# Altium PCB t6.3.PcbDoc
Units mm, origin at the board's own origin, x right, y up, seen from the top; angles counter-clockwise.
Board outline 52.36 x 71.37 mm, 2 copper layers (Top Layer, Bottom Layer), stack 0.818 mm thick; 27 components, 68 nets, 257 pads, 68 vias.
Unrouted connection lines stored in the file: 4.
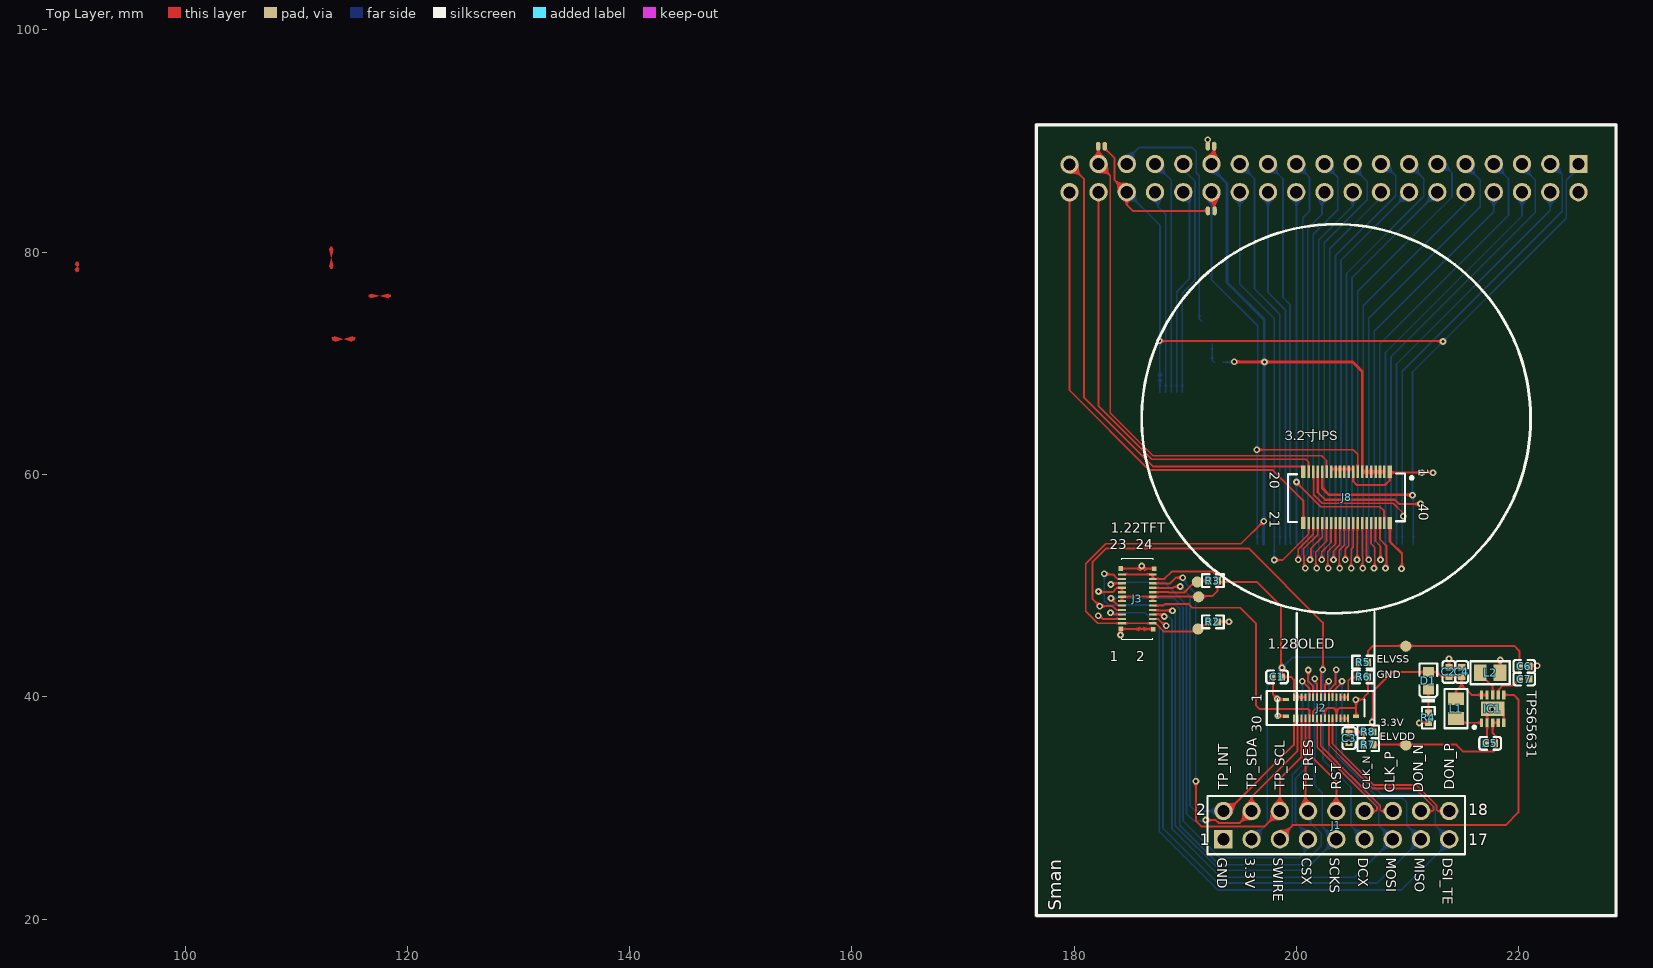
[diagram p0: Top Layer view]
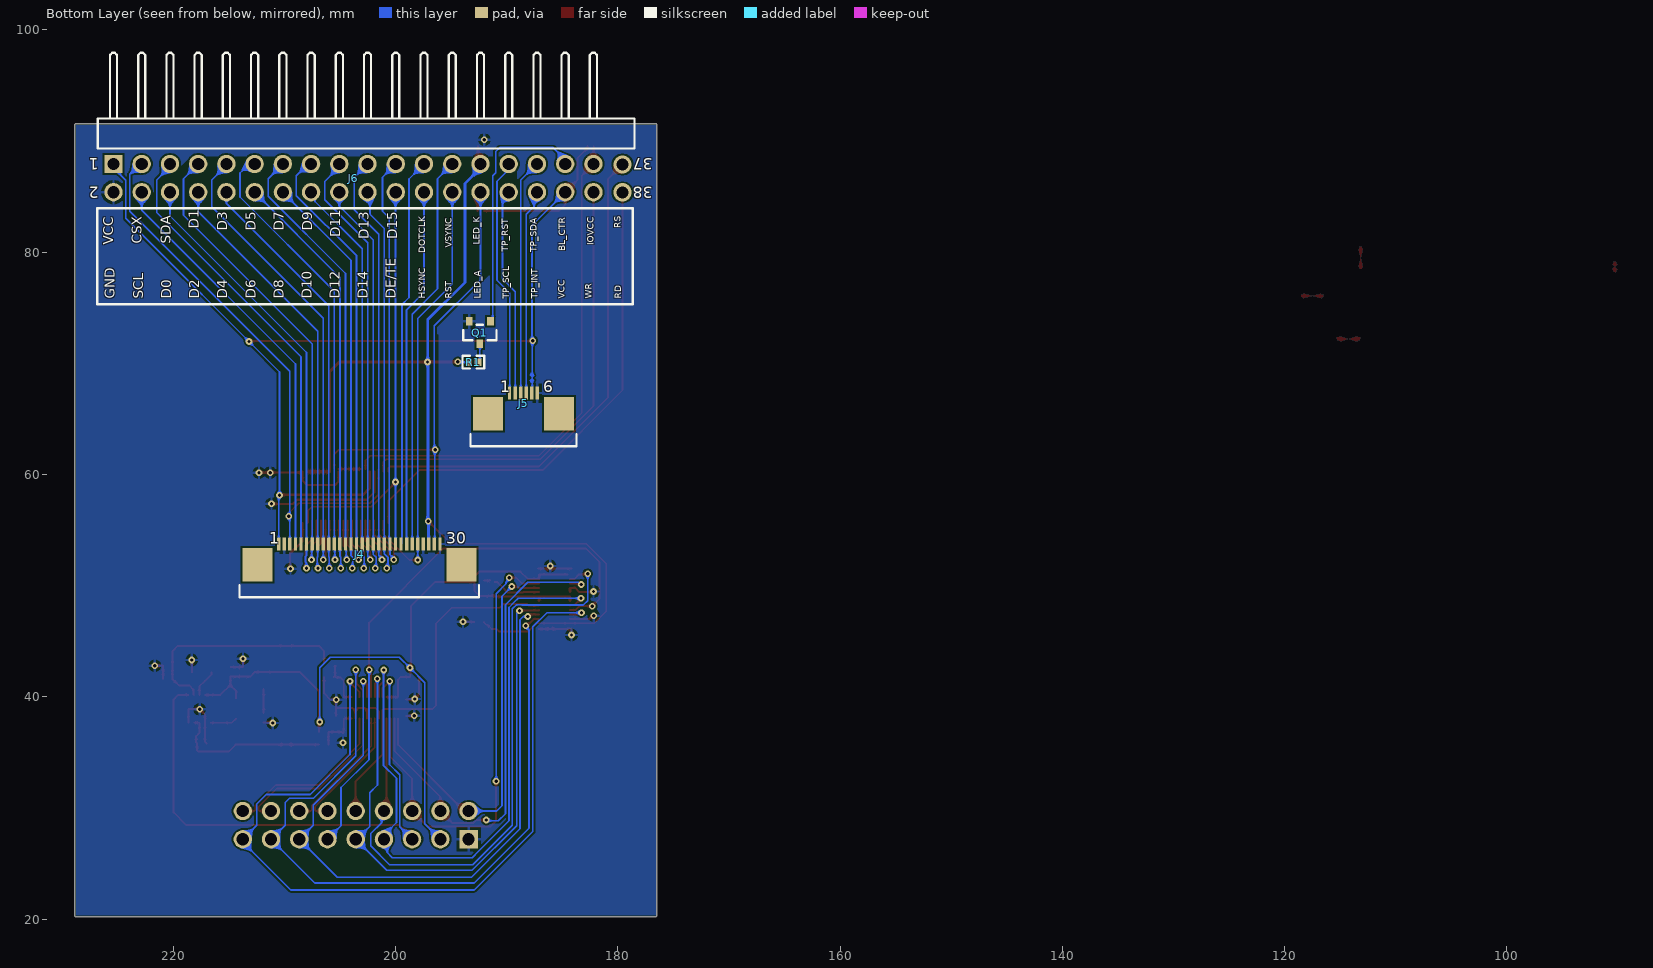
[diagram p1: Bottom Layer view, seen from below]
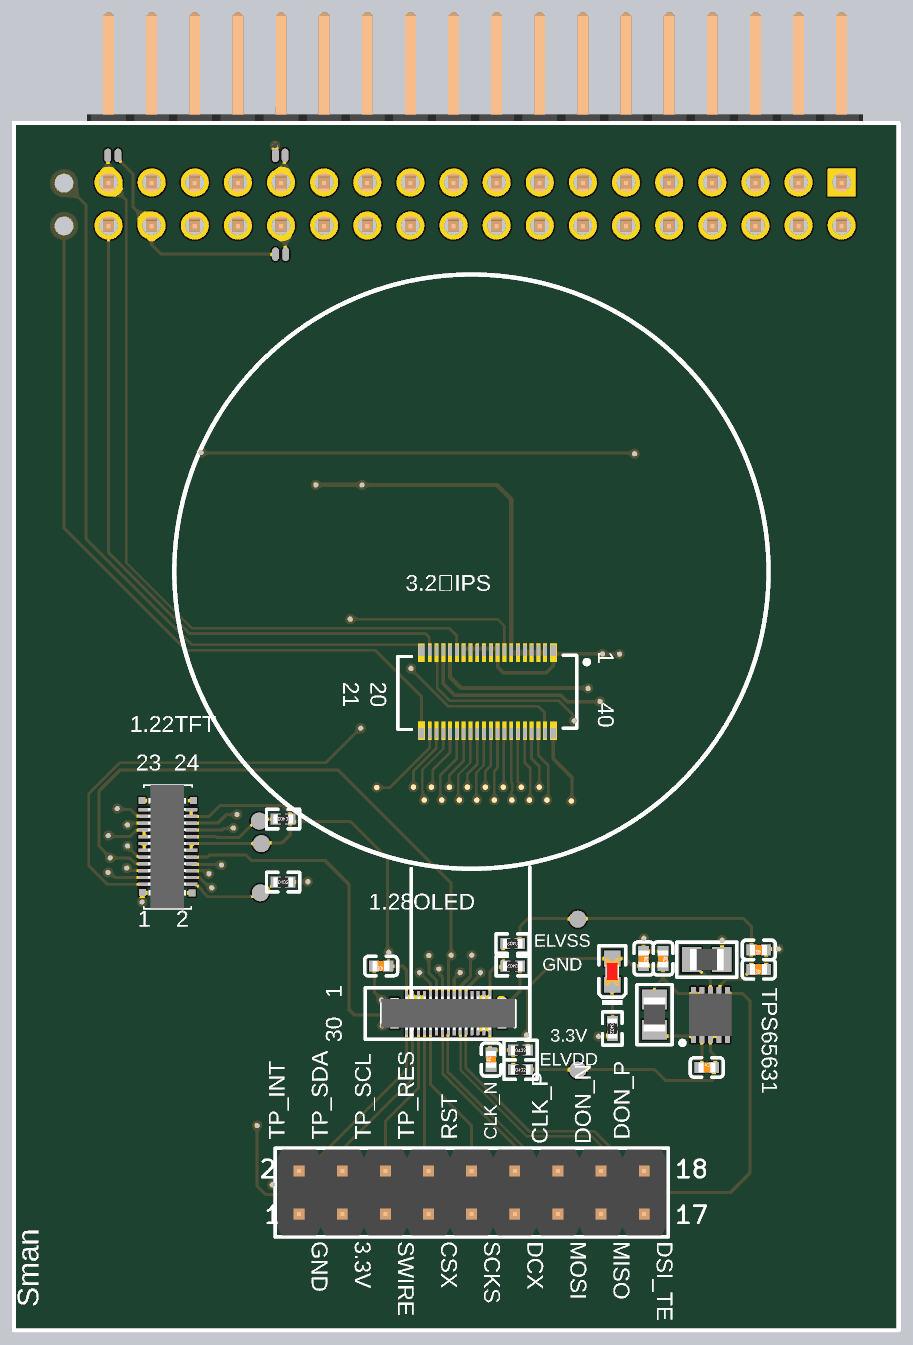
[diagram p2: 3D render of the assembled board from above, using the file's embedded part models]
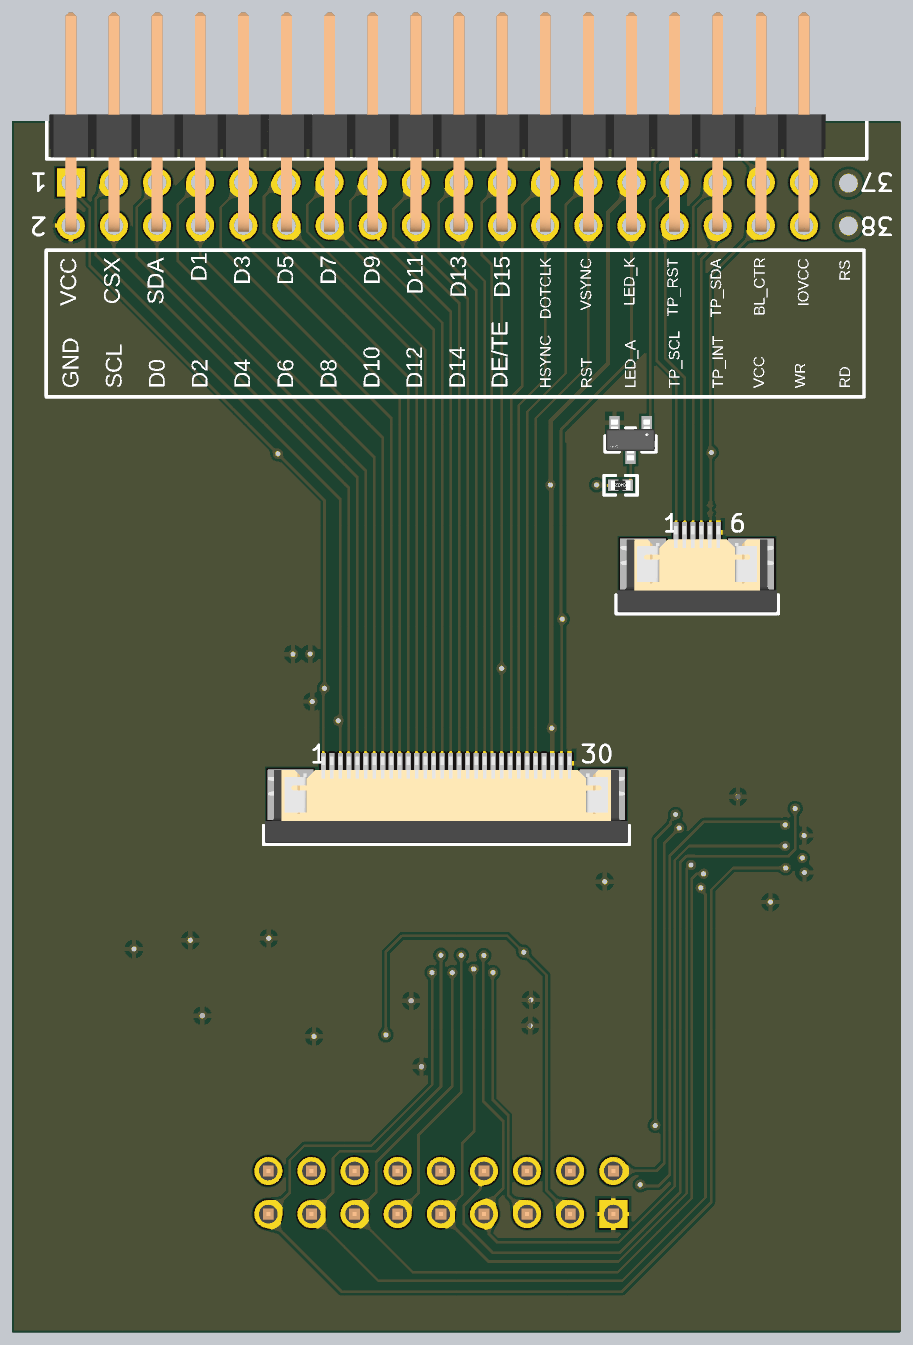
[diagram p3: 3D render of the assembled board from below, using the file's embedded part models]

## Layer stack, top to bottom
Top Solder: solder mask 0.0102, Solder Resist, Dk 3.5
Top Layer: signal copper 0.0356
Dielectric 6: prepreg 0.0711, PP-006, Dk 4.1
Dielectric 4: prepreg 0.0711, PP-006, Dk 4.1
Dielectric 2: prepreg 0.0711, PP-006, Dk 4.1
Dielectric 1: dielectric 0.32, FR-4, Dk 4.8
Dielectric 3: prepreg 0.0711, PP-006, Dk 4.1
Dielectric 5: prepreg 0.0711, PP-006, Dk 4.1
Dielectric 7: prepreg 0.0711, PP-006, Dk 4.1
Bottom Layer: signal copper 0.0356
Bottom Solder: solder mask 0.0102, Solder Resist, Dk 3.5

## Board outline
176.49,20.32 176.49,91.44 cw(c176.617,91.44) 176.617,91.567 228.727,91.567 cw(c228.727,91.44) 228.854,91.44 228.854,20.32 cw(c228.727,20.32) 228.727,20.193 176.617,20.193 cw(c176.617,20.32)

## Design rules (kind name [scope] priority, off if disabled: settings)
Clearance [All] p1: gap=0.152 ignorepadtopadclearanceinfootprint=FALSE
DiffPairsRouting DiffPairsRouting_1 [All] p1: maxlimit=0.254 minlimit=0.152 mostfreqgap=0.152 toplayer_minwidth=0.152 toplayer_maxwidth=0.152 toplayer_prefwidth=0.152 bottomlayer_minwidth=0.152 bottomlayer_maxwidth=0.152 bottomlayer_prefwidth=0.152 maxuncoupledlength=12.7
MatchedLengths [InDifferentialPair ('DON')] p1: tolerance=25.4 checknetsindiffpair=FALSE checkdiffpairvsdiffpair=TRUE checkxsignals=TRUE checkothers=TRUE
MatchedLengths DiffPair_MatchedLengths [InDifferentialPairClass('New Class')] p2: tolerance=25.4 checknetsindiffpair=FALSE checkdiffpairvsdiffpair=TRUE checkxsignals=TRUE checkothers=TRUE
MatchedLengths DiffPair_MatchedLengths_1 [InDifferentialPairClass('New Class')] p3: tolerance=25.4 checknetsindiffpair=FALSE checkdiffpairvsdiffpair=TRUE checkxsignals=TRUE checkothers=TRUE
MatchedLengths DiffPair_MatchedLengths_2 [InDifferentialPairClass('New Class')] p4: tolerance=25.4 checknetsindiffpair=FALSE checkdiffpairvsdiffpair=TRUE checkxsignals=TRUE checkothers=TRUE
MatchedLengths DiffPair_MatchedLengths_3 [InDifferentialPairClass('New Class')] p5: tolerance=25.4 checknetsindiffpair=FALSE checkdiffpairvsdiffpair=TRUE checkxsignals=TRUE checkothers=TRUE
MatchedLengths DiffPair_MatchedLengths_4 [InDifferentialPairClass('New Class')] p6: tolerance=25.4 checknetsindiffpair=FALSE checkdiffpairvsdiffpair=TRUE checkxsignals=TRUE checkothers=TRUE
PolygonConnect [All] p1: connectstyle=Relief reliefconductorwidth=0.254 reliefentries=4 polygonreliefangle="90 Angle" airgapwidth=0.254
RoutingVias [All] p1: holewidth=0.711 width=1.27 viastyle="Through Hole" minholewidth=0.711 minwidth=1.27 maxholewidth=0.711 maxwidth=1.27
SolderMaskExpansion [All] p1: expansion=0.102 istentingtop=FALSE
Width [All] p1: maxlimit=0.254 minlimit=0.1 preferedwidth=0.254
29 further rules are at their usual default settings.

## Classes and differential pairs
component class MIAN: C1 C2 C3 C4 C5 C6 C7 D1 IC1 J1 J2 J3 J4 J5 L1 L2 Q1 R1 R3 R4 R5 R6 R7 R8
differential pair DON: +DON_P -DON_N
differential pair CLK: +CLK_P -CLK_N

## Components (designator, comment, footprint, x,y, rotation, side; value= is the part's Value field where it differs from the comment)
C1 "100nF" 0402_C 198.247,41.783 r180 top value=100pF
C2 "10uF" 0402_C 213.714,42.231 r270 top
C3 "100nF" 0402_C 204.724,36.278 r90 top value=100pF
C4 "10uF" 0402_C 214.857,42.231 r270 top
C5 "10uF" 0402_C 217.424,35.814 r0 top
C6 "10uF" 0402_C 220.489,42.739 r180 top
C7 "10uF" 0402_C 220.489,41.596 r180 top
D1 "红灯 0603" 0603_LED_S1 211.863,41.454 r90 top
IC1 "TPS65631" SON50P250X250X80-11N-D 217.643,38.909 r90 top
J1 "61301821121" 61301821121 203.581,28.448 r0 top locked
J2 "BM28B0.6-30DS_2-0.35V_53_" BM28B0630DS2035V53 202.331,39.006 r0 top
J3 "BM14B_0.8_-24DS-0.4V_53_" BM14B0824DS04V53 186.131,48.803 r90 top
J4 "68713014522" 68713014522 203.251,51.177 r180 bottom locked
J5 "68710614522" 68710614522 188.485,64.767 r180 bottom
J6 "61303621021" 61303621021 203.782,90.668 r0 bottom
J8 "AXK770147G" FP-AXK770147G-MFG 201.511,57.937 r180 top (schematic designator J1)
L1 "10uH ±10%" 0805_L 214.349,38.929 r90 top
L2 "10uH ±10%" 0805_L 217.424,42.164 r0 top
Q1 "SS8050-G" FP-SS8050-G-MFG 192.405,72.771 r270 bottom
R1 "0Ω (0R0) ±1%" 0402_R 192.996,70.104 r0 bottom
R2 "0Ω (0R0) ±1%" 0402_R 192.471,46.73 r0 top
R3 "0Ω (0R0) ±1%" 0402_R 192.471,50.444 r180 top
R4 "0Ω (0R0) ±1%" 0402_R 211.863,38.108 r270 top
R5 "0Ω (0R0) ±1%" 0402_R 205.99,43.104 r180 top
R6 "0Ω (0R0) ±1%" 0402_R 205.994,41.783 r180 top
R7 "0Ω (0R0) ±1%" 0402_R 206.458,35.687 r0 top
R8 "0Ω (0R0) ±1%" 0402_R 206.458,36.83 r0 top

## Footprints (in the part's own frame and the unit in brackets; to place one, negate y for a bottom-side part, rotate by r counter-clockwise, add the part's x,y. Pads: shape width x height; smd on the part's side, far side on the other; paste and mask are expansions set on the pad)
0402_C [mm]
  rect 0.6x0.65 smd mask+0.051: 1(-0.425,0) 2(0.425,0)
  silkscreen extent -0.97,-0.58 0.98,0.58, body extent -0.48,-0.3 0.52,0.3, height 0.2
0402_R [mm]
  rect 0.6x0.65 smd mask+0.051: 1(-0.425,0) 2(0.425,0)
  silkscreen extent -0.98,-0.58 0.98,0.57, body extent -0.58,-0.27 0.57,0.28, height 0.41
0603_LED_S1 [mm]
  rect 0.93x0.98 smd: A(0.77,0) K(-0.77,0)
  silkscreen extent -1.98,-0.79 1.54,0.79, body extent -0.8,-0.4 0.8,0.4, height 0.6
0805_L [mm]
  rect 1.16x1.47 smd: 1(-0.89,0) 2(0.89,0)
  silkscreen extent -1.77,-1.03 1.77,1.04, body extent -1.02,-0.64 1.03,0.64, height 0.6
61301821121 [mm] "Pin Header, pitch 2.54 mm, THT, Vertical, dual row, 18p"
  rect 1.65x1.65 hole 1.1: 1(-10.16,-1.27)
  round 1.65 hole 1.1: 2(-10.16,1.27) 3(-7.62,-1.27) 4(-7.62,1.27) 5(-5.08,-1.27) 6(-5.08,1.27) 7(-2.54,-1.27) 8(-2.54,1.27) 9(0,-1.27) 10(0,1.27) 11(2.54,-1.27) 12(2.54,1.27) 13(5.08,-1.27) 14(5.08,1.27) 15(7.62,-1.27) 16(7.62,1.27) 17(10.16,-1.27) 18(10.16,1.27)
  silkscreen extent -11.58,-2.62 11.58,2.62, body extent -11.43,-2.54 11.43,2.54, height 8.59
61303621021 [mm] "Pin Header, pitch 2.54 mm, THT, Angled, dual row, 36p"
  rect 1.65x1.65 hole 1.1: 1(21.59,2.73)
  round 1.65 hole 1.1: 2(21.59,5.27) 3(19.05,2.73) 4(19.05,5.27) 5(16.51,2.73) 6(16.51,5.27) 7(13.97,2.73) 8(13.97,5.27) 9(11.43,2.73) 10(11.43,5.27) 11(8.89,2.73) 12(8.89,5.27) 13(6.35,2.73) 14(6.35,5.27) 15(3.81,2.73) 16(3.81,5.27) 17(1.27,2.73) 18(1.27,5.27) 19(-1.27,2.73) 20(-1.27,5.27) 21(-3.81,2.73) 22(-3.81,5.27) 23(-6.35,2.73) 24(-6.35,5.27) 25(-8.89,2.73) 26(-8.89,5.27) 27(-11.43,2.73) 28(-11.43,5.27) 29(-13.97,2.73) 30(-13.97,5.27) 31(-16.51,2.73) 32(-16.51,5.27) 33(-19.05,2.73) 34(-19.05,5.27) 35(-21.59,2.73) 36(-21.59,5.27)
  silkscreen extent -25.28,-7.27 23.01,1.35, body extent -22.86,-7.27 22.86,5.63, height 5.12
68710614522 [mm] "ZIF Connectors, Horizontal, Bottom Contact, pitch 0.5mm, 6p"
  rect 0.3x1.2 smd: 1(-1.25,2.56) 2(-0.75,2.56) 3(-0.25,2.56) 4(0.25,2.56) 5(0.75,2.56) 6(1.25,2.56)
  rect 2.7x3 smd: MP1(-3.18,0.7) MP2(3.18,0.7)
  silkscreen extent -4.77,-2.22 4.77,-1.12, body extent -4.7,-2.15 4.7,2.95, height 2.1
68713014522 [mm] "ZIF Connectors, Horizontal, Bottom Contact, pitch 0.5mm, 30p"
  rect 0.3x1.2 smd: 1(-7.25,2.56) 2(-6.75,2.56) 3(-6.25,2.56) 4(-5.75,2.56) 5(-5.25,2.56) 6(-4.75,2.56) 7(-4.25,2.56) 8(-3.75,2.56) 9(-3.25,2.56) 10(-2.75,2.56) 11(-2.25,2.56) 12(-1.75,2.56) 13(-1.25,2.56) 14(-0.75,2.56) 15(-0.25,2.56) 16(0.25,2.56) 17(0.75,2.56) 18(1.25,2.56) 19(1.75,2.56) 20(2.25,2.56) 21(2.75,2.56) 22(3.25,2.56) 23(3.75,2.56) 24(4.25,2.56) 25(4.75,2.56) 26(5.25,2.56) 27(5.75,2.56) 28(6.25,2.56) 29(6.75,2.56) 30(7.25,2.56)
  rect 2.7x3 smd: MP1(-9.18,0.7) MP2(9.18,0.7)
  silkscreen extent -10.77,-2.22 10.78,-1.12, body extent -10.7,-2.15 10.7,2.95, height 2.1
BM14B0824DS04V53 [mm]
  rect 0.2x0.7 smd: 1(-2.2,1.831) 2(-2.2,-0.94) 3(-1.8,1.831) 4(-1.8,-0.94) 5(-1.4,1.831) 6(-1.4,-0.94) 7(-1,1.831) 8(-1,-0.94) 9(-0.6,1.831) 10(-0.6,-0.94) 11(-0.2,1.831) 12(-0.2,-0.94) 13(0.2,1.831) 14(0.2,-0.94) 15(0.6,1.831) 16(0.6,-0.94) 17(1,1.831) 18(1,-0.94) 19(1.4,1.831) 20(1.4,-0.94) 21(1.8,1.831) 22(1.8,-0.94) 23(2.2,1.831) 24(2.2,-0.94)
  rect 0.41x0.4 smd: MP1(-2.688,1.942) MP2(-2.713,-0.985) MP3(2.722,-1.058) MP4(2.734,1.961)
  silkscreen extent -3.64,-0.99 3.64,1.85, body extent -3.63,-0.64 3.65,1.6, height 0.9
BM28B0630DS2035V53 [mm]
  rect 0.18x0.7 smd: 1(-2.577,0.95) 2(-2.577,-0.95) 3(-2.227,0.95) 4(-2.227,-0.95) 5(-1.877,0.95) 6(-1.877,-0.95) 7(-1.527,0.95) 8(-1.527,-0.95) 9(-1.177,0.95) 10(-1.177,-0.95) 11(-0.827,0.95) 12(-0.827,-0.95) 13(-0.477,0.95) 14(-0.477,-0.95) 15(-0.127,0.95) 16(-0.127,-0.95) 17(0.223,0.95) 18(0.223,-0.95) 19(0.573,0.95) 20(0.573,-0.95) 21(0.923,0.95) 22(0.923,-0.95) 23(1.273,0.95) 24(1.273,-0.95) 25(1.623,0.95) 26(1.623,-0.95) 27(1.973,0.95) 28(1.973,-0.95) 29(2.323,0.95) 30(2.323,-0.95)
  rect 0.53x0.31 smd: MP1(-3.282,0.745) MP2(-3.282,-0.745) MP3(3.028,-0.745) MP4(3.028,0.745)
  silkscreen extent -4.05,-0.8 3.8,0.79, body extent -4.05,-0.98 3.8,0.98, height 0.7
FP-AXK770147G-MFG [mm]
  rect 0.4x1.1 smd paste-1000 mask+0: 1(-6.885,-2.3) 2(-6.885,2.3) 39(0.894,-2.296) 40(0.89,2.297)
  rect 0.23x1.1 smd paste-1000 mask+0: 3(-6.4,-2.3) 4(-6.4,2.3) 5(-6,-2.3) 6(-6,2.3) 7(-5.6,-2.3) 8(-5.6,2.3) 9(-5.2,-2.3) 10(-5.2,2.3) 11(-4.8,-2.3) 12(-4.8,2.3) 13(-4.4,-2.3) 14(-4.4,2.3) 15(-4,-2.3) 16(-4,2.3) 17(-3.6,-2.3) 18(-3.6,2.3) 19(-3.2,-2.3) 20(-3.2,2.3) 21(-2.8,-2.3) 22(-2.8,2.3) 23(-2.4,-2.3) 24(-2.4,2.3) 25(-2,-2.3) 26(-2,2.3) 27(-1.6,-2.3) 28(-1.6,2.3) 29(-1.2,-2.3) 30(-1.2,2.3) 31(-0.8,-2.3) 32(-0.8,2.3) 33(-0.4,-2.3) 34(-0.4,2.3) 35(0,-2.3) 36(0,2.3) 37(0.4,-2.3) 38(0.4,2.3)
  silkscreen extent -8.97,-2.15 -7.46,2.15
FP-SS8050-G-MFG [mm]
  rect 0.8x0.6 smd paste+0 mask+0: 1(-1.01,0.95) 2(-1.01,-0.95) 3(1.01,0)
  silkscreen extent -0.7,-1.5 0.7,1.5, body extent -1.21,-1.45 1.21,1.45, height 1.15
SON50P250X250X80-11N-D [mm]
  rect 0.8x0.3 smd: 1(-1.25,1) 2(-1.25,0.5) 3(-1.25,0) 4(-1.25,-0.5) 5(-1.25,-1) 6(1.25,-1) 7(1.25,-0.5) 8(1.25,0) 9(1.25,0.5) 10(1.25,1)
  rect 1.3x2.1 smd: 11(0,0)
  silkscreen extent -1.77,1.53 -1.53,1.77, body extent -1.25,-1.25 1.25,1.25, height 0.77

## Part data
C1 C3: library part CAP, "Capacitor", Published=8-Jun-2000, Publisher="Altium Limited", Revision="July-2002: Re-released for DXP Platform."
C2 C4 C5 C6 C7: library part "0402 10uF (106) 20% 6.3V", "贴片电容", Package=0402, SuppliersPartNumber=C15525, ComponentLink1Description=供应商链接, ComponentLink1URL=http://www.szlcsc.com/product/details_16204.html, Supplier=LC
D1: library part "0603 红灯", "发光二极管", Package=0603, SuppliersPartNumber=C2286, ComponentLink1Description=供应商链接, ComponentLink1URL=http://www.szlcsc.com/product/details_2659.html, Supplier=LC
IC1: library part TPS65631WDSKR, "Integrated Circuit", Manufacturer_Name="Texas Instruments", Mouser Part Number=595-TPS65631WDSKR, Arrow Part Number=TPS65631WDSKR, Arrow Price/Stock=https://www.arrow.com/en/products/tps65631wdskr/texas-instruments, Datasheet Link=http://www.ti.com/lit/gpn/tps65631w, Height=0.8mm, Manufacturer_Part_Number=TPS65631WDSKR, Mouser Price/Stock=https://www.mouser.co.uk/ProductDetail/Texas-Instruments/TPS65631WDSKR?qs=6E8igxPflKf9wUn%252Bq%252B8X1Q%3D%3D
J1: library part CMP-1502-01101-1, "THT Vertical Pin Header WR-PHD, Pitch 2.54 mm, Dual Row, 18 pins", Contact Resistance=20mOhm, Manufacturer="Wurth Elektronik", Operating Temperature=-40to105degC, Rated Current=3A, Withstanding Voltage=500VAC, Working Voltage=250VAC, Datasheet URL=https://katalog.we-online.de/em/datasheet/6130xx21121.pdf, Gender=Male, Manufacturer URL=http://www.we-online.de, Mounting Technology=THT, Orientation=Vertical, Package Reference=61301821121, Packaging=Bag, PART NUMBER=61301821121, Pin Number=18, Pitch=2.54mm, Publisher=WurthElektronik, Row Number=Dual
J2: "Connector", Manufacturer_Name=Hirose, Manufacturer_Part_Number=BM28B0.6-30DS/2-0.35V(53), Mouser Part Number=798-28B0630DS2035V53, Datasheet Link=https://datasheet.datasheetarchive.com/originals/distributors/DKDS-30/589689.pdf, Height=0.6mm, Mouser Price/Stock=https://www.mouser.co.uk/ProductDetail/Hirose-Connector/BM28B06-30DS-2-035V53?qs=1mbolxNpo8dyGYNDVauvGQ%3D%3D
J3: "Connector", Arrow Part Number=BM14B(0.8)-24DS-0.4V(53), Manufacturer_Name=Hirose, Mouser Part Number=798-BM14B0824DS04V53, Arrow Price/Stock=https://www.arrow.com/en/products/bm14b-0.8-24ds-0.4v-53/hirose-electric, Datasheet Link=https://www.arrow.com/en/products/bm14b-0.8-24ds-0.4v-53/hirose-electric, Height=0.8mm, Manufacturer_Part_Number=BM14B(0.8)-24DS-0.4V(53), Mouser Price/Stock=https://www.mouser.co.uk/ProductDetail/Hirose-Connector/BM14B08-24DS-04V53?qs=QRVci0nWsCaR3TeKMbLD%252Bw%3D%3D
J4: library part CMP-1502-01540-1, "SMT ZIF Connectors WR-FPC, Horizontal, Bottom Contact, pitch 0.5 mm, 30 pins", Contact Resistance=20mOhm, Manufacturer="Wurth Elektronik", Operating Temperature=-25to85degC, Rated Current=0.5A, Withstanding Voltage=250VAC, Working Voltage=50VAC, Contact Design=BottomContact, Datasheet URL=https://katalog.we-online.de/em/datasheet/68713014522.pdf, Manufacturer URL=http://www.we-online.de, Mounting Technology=SMT, Orientation=Horizontal, Package Reference=68713014522, Packaging=TapeandReel, PART NUMBER=68713014522, Pin Number=30, Pitch=0.5mm, Publisher=WurthElektronik
J5: library part CMP-1502-01527-1, "SMT ZIF Connectors WR-FPC, Horizontal, Bottom Contact, pitch 0.5 mm, 6 pins", Contact Resistance=20mOhm, Manufacturer="Wurth Elektronik", Operating Temperature=-25to85degC, Rated Current=0.5A, Withstanding Voltage=250VAC, Working Voltage=50VAC, Contact Design=BottomContact, Datasheet URL=https://katalog.we-online.de/em/datasheet/68710614522.pdf, Manufacturer URL=http://www.we-online.de, Mounting Technology=SMT, Orientation=Horizontal, Package Reference=68710614522, Packaging=TapeandReel, PART NUMBER=68710614522, Pin Number=6, Pitch=0.5mm, Publisher=WurthElektronik
J6: library part CMP-1502-01130-1, "THT Angled Pin Header WR-PHD, Pitch 2.54 mm, Dual Row, 36 pins", Contact Resistance=20mOhm, Manufacturer="Wurth Elektronik", Operating Temperature=-40to105degC, Rated Current=3A, Withstanding Voltage=500VAC, Working Voltage=250VAC, Datasheet URL=https://katalog.we-online.de/em/datasheet/6130xx21021.pdf, Gender=Male, Manufacturer URL=http://www.we-online.de, Mounting Technology=THT, Orientation=Angled, Package Reference=61303621021, Packaging=Bag, PART NUMBER=61303621021, Pin Number=36, Pitch=2.54mm, Publisher=WurthElektronik, Row Number=Dual
J8: library part CMP-05575-000002-1, "CONN SOCKET 70POS SMD GOLD", Ambient Temperature Range High=+85°C, Ambient Temperature Range Low=-55°C, Current Rating=0.3A, Manufacturer=Panasonic, Package=0, Voltage Rating=60V, Automotive=No, Category=Conn, ComponentLink2Description=Datasheet, ComponentLink2URL=https://media.digikey.com/pdf/Data%20Sheets/Panasonic%20Electric%20Works%20PDFs/AXK7,8_P4_Series_DS.pdf, Conn Gender=Female, Conn Orientation=Vertical, Contact Material=Gold,Nickel, Device Class L1=Connectors, Device Class L2="Board to Board Connectors", Device Class L3=unset, Digikey Description="CONN SOCKET 70POS SMD GOLD", Height=1.7mm, Is Female=yes, Lead Free=Yes, Manufacturer Part Number=AXK770147G, Mouser Description="Board to Board & Mezzanine Connectors CONN SOCKET BRD/BRD 70 POS 0.4mm", Number Of Contacts=70, Number Of Rows=2, Octopart=https://octopart.com/axk770147g-panasonic-7880250, Pitch=0.4mm, RoHS=TRUE
L1 L2: library part "0805 10uH 10%", "贴片电感", Package=0805, SuppliersPartNumber=C1046, ComponentLink1Description=供应商链接, ComponentLink1URL=http://www.szlcsc.com/product/details_1398.html, Supplier=LC
Q1: library part CMP-20235-000001-1, "NPN TRANSISTOR 1.5A 40V SOT-23 R", Case/Package=TO-236-3, Collector Emitter Breakdown Voltage=25V, Collector Emitter Voltage (VCEO)=400mV, Max Collector Current=1.5A, Max Power Dissipation=300mW, Transition Frequency=100MHz, Max Breakdown Voltage=25V, Mount="Surface Mount", Packaging="Tape and Reel", RoHS Compliant=Yes
R1 R2 R3 R4 R5 R6 R7 R8: library part "0402 0Ω (0R0) 1%", "贴片电阻", Package=0402, SuppliersPartNumber=C17168, ComponentLink1Description=供应商链接, ComponentLink1URL=http://www.szlcsc.com/product/details_17853.html, Supplier=LC

## Free pads (board coordinates)
  oval 0.4x0.8 smd: 1(182.15,89.531) 1(182.745,89.531) 1(192.024,89.535) 1(192.03,83.711) 1(192.587,89.535) 1(192.625,83.711)
  round 1 smd: 1(191.071,50.325) 1(191.135,46.101) 1(191.198,48.993) 1(209.833,35.656) 1(209.833,44.546)

## Via types
v1: diameter 0.6, hole 0.3, Top Layer to Bottom Layer, tented both sides, 66 vias
v2: diameter 1.65, hole 1.1, Top Layer to Bottom Layer, tented both sides, 2 vias

## Nets (pads, with @x,y where several pads share a name; then routed paths per layer and width w, separated by ;. In a path a pad name is that pad's centre, name@x,y a point inside that pad or via, vN(x,y) a via of type N, cw(c..) or ccw(c..) an arc to the next point about the centre after c; other vN are vias at no path point)
3V3: C1.1 C2.2 C4.2 D1.A IC1.9 IC1.10 J1.3 J2.1 J2.3 J2.5 J2.7 J3.11 J3.12 J3.13 J3.14 J3.22 J3.23 J3.24 L1.2 pad.1@191.198,48.993 R3.1 R8.2 | length 85
  Top Layer w0.178: J3.11 J3.13 J3.14@186.971,49.003 ; J3.23@184.531,51.003 J3.24 J3.22 188.109,50.603 188.76,51.254 192.459,51.254 192.896,50.817 R3.1 R3.1@192.896,50.309 ; J3.12 J3.14 J3.14@186.971,49.003 ; pad.1@191.156,49.146 191.18,49.003 187.833,49.003 J3.14@186.971,49.003 ; pad.1@191.198,48.993 191.252,49.047 192.427,49.047 192.896,49.516 R3.1@192.896,50.309 ; pad.1@191.24,49.16 191.258,49.177 pad.1@191.32,49.115 ; J2.7 J2.1 199.754,41.546 199.517,41.783 C1.1 198.672,42.596 198.619,42.649 198.619,48.142 196.452,50.309 R3.1@192.896,50.309 ; R8.2 206.883,40.513 208.594,42.224 D1.A 212.665,42.224 213.083,41.806 C2.2 C4.2 214.857,41.048 ; L1.2 214.349,40.54 214.857,41.048 ; IC1.9 IC1.10 215.746,40.159 214.857,41.048
  Bottom Layer w0.152: J1.3 197.358,28.575 197.358,41.259 v1(198.696,42.596) 199.66,43.561 205.878,43.561 206.816,42.623 v1(206.816,37.731)
BL_CTR: J6.33 Q1.1 | length 22.7
  Bottom Layer w0.152: J6.33 184.732,88.339 185.801,89.408 190.627,89.408 190.976,89.059 190.976,87.154 191.244,86.886 191.244,73.992 Q1.1
CLK_N: J1.12 J2.14 | length 11.6
  Top Layer w0.152: J2.14 201.868,38.042 201.868,37.755 201.877,37.746 201.877,35.436 202.095,35.217 204.735,32.578 204.751,32.578 207.239,30.09 207.239,29.807 207.149,29.718 J1.12
CLK_P: J1.14 J2.16 | length 11.6
  Top Layer w0.152: J2.16 202.19,38.042 202.19,37.755 202.181,37.746 202.181,35.563 202.527,35.217 204.861,32.883 204.877,32.883 207.543,30.217 207.543,29.807 207.633,29.718 J1.14
CSX: J1.7 J2.11 J3.9 J4.3 J6.3 J8.35 | length 112.2
  Top Layer w0.152: v1(183.303,48.859) 183.303,48.827 183.903,48.227 184.276,48.227 J3.9 ; J8.35@201.503,60.482 201.542,60.443 201.542,58.173 202.311,57.404 208.711,57.404 209.532,56.583 209.532,56.322 v1(209.618,56.236)
  Top Layer w0.178: v1@201.053,42.403 201.053,41.39 201.504,40.939 J2.11
  Bottom Layer w0.152: v1(183.303,48.859) 183.304,48.858 188.967,48.858 189.331,48.494 189.792,48.034 189.792,28.834 192.367,26.258 192.501,26.124 193.099,25.527 200.279,25.527 200.744,25.992 200.744,27.262 201.041,27.559 199.915,28.685 199.915,32.656 201.085,33.826 201.085,42.371 v1(201.05,42.407) ; J4.3 209.501,55.997 209.532,56.029 209.532,56.087 v1@209.501,56.119 ; v1(209.618,56.236) v1@209.501,56.119 ; J6.3 222.958,87.938 223.901,86.995 223.901,83.693 209.501,69.293 v1@209.501,56.119
D0: J4.6 J6.6 J8.6 | length 43.6
  Top Layer w0.152: J8.6@207.503,55.882 207.503,54.186 208.089,53.6 208.089,51.641 v1(208.01,51.562)
  Bottom Layer w0.152: v1(208.01,51.562) 208.01,52.026 208.089,52.105 208.089,52.615 208.001,52.703 J4.6 208.001,70.968 220.292,83.259 J6.6
D1: J4.7 J6.7 J8.8 | length 44.7
  Top Layer w0.152: J8.8@207.103,55.882 207.103,54.009 207.56,53.552 v1(207.56,52.324)
  Bottom Layer w0.152: v1(207.56,52.324) 207.53,52.354 207.53,53.707 J4.7 207.501,71.738 219.075,83.312 219.075,86.615 J6.7
D2: J4.8 J6.8 J8.10 | length 42.8
  Top Layer w0.152: J8.10@206.703,55.882 206.703,53.752 207.031,53.424 207.031,51.614 v1(206.978,51.562)
  Bottom Layer w0.152: v1(206.978,51.562) 207.031,51.614 207.031,52.543 207.001,52.573 J4.8 207.001,72.889 217.752,83.64 J6.8
D3: J4.9 J6.9 J8.12 | length 44
  Top Layer w0.152: J8.12@206.303,55.882 206.303,52.644 206.502,52.445 v1(206.502,52.324)
  Bottom Layer w0.152: v1(206.502,52.324) J4.9@206.501,53.736 ; J4.9 206.501,74.04 216.535,84.074 216.535,86.487 215.212,87.81 J6.9
D4: J4.10 J6.10 J8.14 | length 42.1
  Top Layer w0.152: J8.14@205.903,55.882 205.903,52.612 205.972,52.543 205.972,52.105 205.903,52.036 205.903,51.606 v1(205.946,51.562)
  Bottom Layer w0.152: v1(205.946,51.562) 205.972,51.588 205.972,52.542 206.001,52.57 J4.10 206.001,75.191 215.212,84.402 J6.10
D5: J4.11 J6.11 J8.16 | length 43.6
  Top Layer w0.152: v1(205.444,52.324) 205.473,52.354 205.473,55.852 J8.16@205.503,55.882
  Bottom Layer w0.152: v1(205.444,52.324) 205.472,52.352 205.472,53.708 J4.11 205.501,76.469 213.995,84.963 213.995,87.122 213.179,87.938 J6.11
D6: J4.12 J6.12 J8.18 | length 41.4
  Top Layer w0.152: v1(204.915,51.562) 204.915,53.276 205.103,53.465 J8.18@205.103,55.882
  Bottom Layer w0.152: v1(204.915,51.562) 204.915,52.542 205.001,52.628 J4.12 205.001,77.727 J6.12
D7: J4.13 J6.13 J8.20 | length 42.8
  Top Layer w0.152: v1(204.385,52.324) 204.385,53.255 204.703,53.573 J8.20@204.703,55.882
  Bottom Layer w0.152: v1(204.385,52.324) 204.443,52.382 204.443,53.679 J4.13 204.501,78.083 211.455,85.037 211.455,86.615 J6.13
D8: J4.14 J6.14 J8.22 | length 41
  Top Layer w0.152: v1(203.883,51.562) 203.857,51.588 203.857,53.185 204.303,53.631 J8.22@204.303,55.882
  Bottom Layer w0.152: v1(203.883,51.562) 203.857,51.588 203.857,52.543 204.001,52.687 J4.14 204.001,79.267 J6.14
D9: J4.15 J6.15 J8.24 | length 42.4
  Top Layer w0.152: v1(203.327,52.324) 203.327,53.086 203.903,53.662 J8.24@203.903,55.882
  Bottom Layer w0.152: v1(203.327,52.324) 203.327,52.445 203.501,52.619 J4.15 203.501,79.676 208.915,85.09 208.915,86.868 207.845,87.938 J6.15
D10: J4.16 J6.16 J8.26 | length 40.5
  Top Layer w0.152: v1(202.851,51.562) 202.798,51.614 202.798,53.065 203.503,53.77 J8.26@203.503,55.882
  Bottom Layer w0.152: v1(202.851,51.562) 202.798,51.614 202.798,52.543 203.001,52.745 J4.16 203.001,80.319 207.244,84.562 207.244,84.644 207.592,84.992 J6.16
D11: J4.17 J6.17 J8.28 | length 41.8
  Top Layer w0.152: v1(202.269,52.324) 202.269,53.044 203.103,53.878 J8.28@203.103,55.882
  Bottom Layer w0.152: v1(202.269,52.324) 202.269,52.445 202.501,52.677 J4.17 202.501,80.835 206.375,84.709 206.375,86.36 205.052,87.683 J6.17
D12: J4.18 J6.18 J8.30 | length 40
  Top Layer w0.152: v1(201.819,51.562) 201.74,51.641 201.74,53.023 202.703,53.986 J8.30@202.703,55.882
  Bottom Layer w0.152: v1(201.819,51.562) 201.74,51.641 201.74,52.543 202.001,52.803 J4.18 202.001,81.097 205.052,84.148 J6.18
D13: J4.19 J6.19 J8.32 | length 41.2
  Top Layer w0.152: v1(201.21,52.324) 201.295,52.409 201.295,53.34 202.303,54.348 J8.32@202.303,55.882
  Bottom Layer w0.152: v1(201.21,52.324) 201.21,52.445 201.501,52.735 J4.19 201.501,81.613 203.708,83.82 203.708,86.742 J6.19
D14: J4.20 J6.20 J8.34 | length 39.5
  Top Layer w0.152: v1(200.787,51.562) 200.701,51.648 200.701,52.085 200.681,52.106 200.681,52.554 200.66,52.575 200.66,53.34 201.903,54.583 J8.34@201.903,55.882
  Bottom Layer w0.152: v1(200.787,51.562) 200.787,51.683 200.682,51.788 200.682,52.543 201.001,52.862 J4.20 201.001,82.129 202.292,83.42 202.292,85.178 J6.20
D15: J4.21 J6.21 J8.36 | length 40.6
  Top Layer w0.152: v1(200.152,52.324) 200.152,53.263 201.503,54.614 J8.36@201.503,55.882
  Bottom Layer w0.152: J6.21 201.168,86.742 201.168,83.693 200.573,83.098 200.573,53.81 J4.21 200.501,52.793 200.152,52.444 v1(200.152,52.324)
DCX: J1.11 J2.15 J3.7 | length 54
  Top Layer w0.15: 183.762,47.831 183.791,47.803 J3.7
  Top Layer w0.178: 183.762,47.831 183.493,48.101 183.471,48.101 183.417,48.155 v1(182.291,48.155) 182.291,48.182 181.641,48.832 181.641,52.101 182.88,53.34 195.707,53.34 202.374,46.672 v1(202.374,42.418) 202.374,42.296 202.204,42.126 J2.15
  Bottom Layer w0.152: v1(202.374,42.418) 202.374,34.353 204.898,31.83 204.898,28.401 J1.11
DE: J4.22 J6.22 J8.4 | length 41.7
  Top Layer w0.16: v1@199.983,59.309 199.983,59.296 202.183,57.095 207.5,57.095 207.876,56.719 207.876,55.672 J8.4
  Bottom Layer w0.152: J6.22 200.001,85.37 J4.22
  other v1: 200.003,59.314
DON_N: J1.16 J2.20 | length 15.5
  Top Layer w0.152: J2.20 202.918,38.042 202.918,37.755 202.927,37.746 202.927,35.656 205.016,33.566 206.83,31.753 210.656,31.753 212.319,30.09 212.319,29.807 212.229,29.718 J1.16
DON_P: J1.18 J2.22 | length 15.5
  Top Layer w0.152: J2.22 203.24,38.042 203.24,37.755 203.231,37.746 203.231,35.783 205.448,33.566 206.957,32.057 210.783,32.057 212.623,30.217 212.623,29.807 212.713,29.718 J1.18
DOTCLK: J4.23 J6.23 | length 35.1
  Bottom Layer w0.152: J6.23 198.783,86.587 198.783,75.918 199.421,75.28 199.421,54.35 199.427,54.344 199.427,53.811 J4.23
DSI_RST: J1.10 J2.10 J3.10 | length 32.5
  Top Layer w0.178: J3.10 188.03,48.203 188.153,48.326 190.307,48.326 190.627,48.006 194.945,48.006 196.342,46.609 196.342,39.243 196.694,38.891 201.05,38.891 201.155,38.787 J2.10@201.155,38.057 ; J2.10 201.154,34.812 203.581,32.385 J1.10
DSI_TE: J1.17 J2.21 J3.5 | length 77.2
  Top Layer w0.178: v1@183.312,47.403 183.269,47.446 v1(183.269,47.56) 183.404,47.56 183.561,47.403 J3.5 ; J2.21 203.255,39.957 203.255,40.443 203.888,41.075 203.888,41.077 204.099,41.288 v1(204.099,41.402)
  Bottom Layer w0.152: v1(183.269,47.56) 186.374,47.56 187.646,46.288 187.646,27.873 192.913,22.606 209.423,22.606 213.741,26.924 J1.17 212.471,28.448 212.471,30.353 211.615,31.209 207.678,31.209 204.089,34.798 204.089,41.392 v1(204.099,41.402)
ELVDD: C5.2 IC1.3 IC1.4 pad.1@209.833,35.656 R7.2 | length 14.4
  Top Layer w0.178: R7.2 214.376,35.687 215.011,35.052 217.732,35.052 217.849,35.169 C5.2 217.932,35.897 217.932,36.449 217.643,36.738 IC1.3 IC1.4
ELVSS: C6.2 C7.2 IC1.7 pad.1@209.833,44.546 R5.1 | length 20.3
  Top Layer w0.178: R5.1 206.415,44.109 206.883,44.577 209.833,44.577 219.583,44.577 220.064,44.096 C6.2 C7.2 220.064,41.571 219.864,41.371 219.839,41.371 219.489,41.021 218.567,41.021 218.193,40.647 218.193,40.209 IC1.7
GND: C1.2 C2.1 C3.1 C4.1 C5.1 C6.1 C7.1 IC1.2 IC1.5 IC1.11 J1.1 J2.12 J2.18 J2.24 J2.MP1 J2.MP2 J2.MP3 J2.MP4 J3.3 J3.15 J3.17 J3.MP1 J3.MP2 J3.MP3 J3.MP4 J4.2 J4.27 J4.30 J5.6 J6.2 J8.1 J8.2 J8.17 J8.19 J8.21 J8.23 J8.25 J8.27 J8.33 L2.2 pad.1@192.024,89.535 Q1.2 R2.2 R4.2 R6.1 | length 65.9
  Top Layer w0.178: v1(182.165,47.293) 182.279,47.293 182.56,47.012 184.291,47.012 J3.3 ; v1(182.183,49.472) 182.235,49.419 183.463,49.419 183.838,49.794 184.291,49.794 J3.17 J3.15 ; J3.MP4 184.176,51.531 185.733,51.531 185.965,51.764 186.088,51.764 186.32,51.531 187.183,51.531 J3.MP3 ; R2.2 192.91,46.745 193.916,46.745 v1(193.931,46.759) ; C1.2 197.866,41.783 197.866,40.232 198.272,39.826 v1(198.272,39.79) 198.272,39.751 J2.MP1 ; v1(198.315,38.278) 198.315,38.261 J2.MP2 ; J2.12 201.504,38.69 201.803,38.989 202.311,38.989 202.554,38.746 ; J2.18 202.554,38.746 ; J2.24 203.604,38.712 ; J2.MP3 205.359,38.983 ; R6.1 206.419,40.303 205.852,39.736 v1(205.328,39.736) 205.359,39.705 205.359,38.983 ; v1(211.048,37.644) 211.048,37.683 R4.2 ; v1(213.719,43.417) 213.714,43.417 C2.1 C4.1 ; C5.1 217.143,35.958 IC1.2 217.152,37.668 217.152,38.418 IC1.11 218.643,38.909 IC1.5 ; L2.2 218.314,43.303 v1(218.331,43.303) ; C7.1 C6.1 220.914,42.789 v1(221.656,42.789) ; 202.554,38.746 202.797,38.989 203.327,38.989 203.604,38.712 ; 203.604,38.712 203.881,38.989 205.353,38.989 205.359,38.983
  Top Layer w0.2: v1(184.168,45.553) 184.178,45.564 184.178,46.104 J3.MP1 184.202,46.102 187.104,46.102 J3.MP2 ; J8.33 201.911,58.406 202.584,57.733 208.847,57.733 209.238,57.342 v1@211.147,57.342 ; J8.27@203.103,60.482 J8.17@205.103,60.482 ; J8.17 205.111,59.375 205.431,59.056 207.964,59.056 208.396,59.487 J8.1 208.459,60.173 212.266,60.173 v1(212.286,60.153) ; J8.2 208.396,53.972 209.489,52.879 209.489,51.545 v1(209.45,51.506)
  other v1: 204.72,35.861 217.625,38.864 186.08,51.764 211.149,57.364 211.277,60.168 192.001,90.118
GVDD: J3.16 pad.1@191.071,50.325 R3.2 | length 5
  Top Layer w0.178: J3.16 188.501,49.403 188.546,49.358 189.877,49.358 190.592,50.073 190.602,50.073 190.854,50.325 pad.1@191.071,50.325 ; pad.1@191.499,50.444 R3.2
HSYNC: J4.24 J6.24 | length 32.3
  Bottom Layer w0.152: J6.24 197.432,76.38 199.001,74.811 J4.24
IOVCC: J6.35 J8.29 pad.1@182.15,89.531 | length 46.5
  Top Layer w0.152: pad.1@182.15,89.531 182.171,89.51 182.171,87.959 J6.35 183.246,86.885 183.246,65.522 187.091,61.677 202.278,61.677 202.703,61.252 J8.29@202.703,60.482
LED_A: J4.29 J6.28 J8.15 pad.1@192.625,83.711 | length 45.8
  Top Layer w0.152: v1(196.427,62.22) 205.115,62.22 205.503,61.832 J8.15@205.503,60.482
  Top Layer w0.178: J6.28 192.596,85.154 192.596,83.739 pad.1@192.625,83.711
  Bottom Layer w0.152: J6.28 192.352,77.523 196.501,73.374 196.501,62.293 v1(196.427,62.22) 196.464,62.183 196.464,53.774 J4.29
LED_K: J3.1 J3.2 J4.28 J6.27 J8.3 J8.5 J8.7 J8.9 J8.11 J8.13 pad.1@191.135,46.101 pad.1@192.587,89.535 R1.2 R2.1 | length 95.6
  Top Layer w0.16: R2.1 192.046,46.705 191.826,46.485 191.746,46.485 191.362,46.101 191.135,46.101 190.908,46.101 190.67,45.863 188.049,45.863 187.731,46.181 187.731,46.209 187.413,46.527 187.397,46.527 187.321,46.603 J3.2 J3.1 182.102,46.603 181.029,47.676 181.029,51.948 182.837,53.756 195.006,53.756 v1(197.043,55.793)
  Top Layer w0.178: J6.27 192.559,88.145 192.559,89.507 pad.1@192.587,89.535
  Top Layer w0.254: v1(194.407,70.127) 197.115,70.127 v1(197.125,70.117) 205.054,70.117 205.911,69.26 J8.13 J8.11 J8.9 J8.7 J8.3
  Bottom Layer w0.152: R1.2 193.424,70.107 v1@194.198,70.107
  Bottom Layer w0.252: J6.27 192.352,87.556 193.737,86.171 193.737,77.281 197.104,73.914 197.104,70.138 v1(197.125,70.117) 197.084,70.076 197.084,55.876 197.001,55.793 197.022,55.772 197.022,53.758 J4.28
LED_K1: 
LED_K2: 
LED_K3: 
LED_K4: 
LED_K5: 
LED_K6: 
LEDA: 
LEDK1: 
NetC3_2: C3.2 J2.26 J2.28 J2.30 R7.1 R8.1 | length 4.6
  Top Layer w0.178: J2.26 J2.30 204.654,36.773 C3.2 204.851,36.83 R8.1 R7.1
NetD1_K: D1.K R4.1 | length 2.2
  Top Layer w0.178: R4.1 D1.K
NetIC1_1: IC1.1 L1.1 | length 2.5
  Top Layer w0.178: L1.1 214.729,37.659 IC1.1
NetIC1_8: IC1.8 L2.1 | length 2.5
  Top Layer w0.178: L2.1 216.534,42.009 217.141,41.402 217.17,41.402 217.643,40.929 IC1.8
NetJ2_25: J2.25 J2.27 J2.29 R5.2 R6.2 | length 4.3
  Top Layer w0.178: J2.25 J2.27 J2.29 204.654,41.436 204.957,41.739 205.369,41.739 205.428,41.798 205.442,41.798 R5.2@205.442,42.799 ; R6.2@205.374,41.798 205.554,41.798 R6.2
NetQ1_3: Q1.3 R1.1 | length 1.7
  Bottom Layer w0.152: Q1.3 192.405,70.27 R1.1
RD: J8.40 | length 45
  Top Layer w0.16: v2(179.573,85.38) 179.573,67.574 186.756,60.391 197.879,60.391 200.621,57.649 J8.40
RS: J8.39 | length 44.2
  Top Layer w0.16: v2(179.573,87.893) 180.872,86.595 180.872,66.934 187.103,60.703 200.496,60.703 200.616,60.583 J8.39
RST: J4.26 J6.26 J8.38 | length 39.7
  Top Layer w0.152: v1(197.988,52.299) 198.757,52.299 201.103,54.645 J8.38@201.103,55.882
  Bottom Layer w0.152: J6.26 194.892,77.142 198.001,74.033 J4.26 197.994,53.731 197.994,52.305 v1(197.988,52.299)
SCL: J4.4 J6.4 | length 37.4
  Bottom Layer w0.152: J4.4 209.001,69.936 222.832,83.767 J6.4
SDA: J4.5 J6.5 | length 40.2
  Bottom Layer w0.152: J4.5@208.56,53.678 J4.5 208.501,70.579 221.488,83.566 221.488,86.487 220.292,87.683 J6.5
SPI1_MISO: J1.15 J2.19 J3.4 | length 69.1
  Top Layer w0.178: J3.4 187.082,46.992 187.575,46.992 188.171,46.395 v1(188.27,46.395) ; J2.19 202.904,40.558 203.499,41.154 203.499,42.103 203.5,42.104 203.5,42.337 v1(203.581,42.418)
  Bottom Layer w0.152: v1(188.27,46.395) 188.27,46.274 187.99,45.994 187.99,28.164 192.913,23.241 207.264,23.241 J1.15 209.931,28.448 209.931,30.48 209.534,30.877 207.375,30.877 203.57,34.682 v1@203.57,42.407
SPI1_MOSI: J1.13 J2.17 J3.6 | length 62
  Top Layer w0.178: J3.6 187.929,47.403 v1(188.108,47.224) ; J2.17 202.554,41.052 v1(202.904,41.402)
  Bottom Layer w0.152: v1(188.108,47.224) 188.116,47.217 188.5,47.217 188.798,46.918 188.798,28.118 193.167,23.749 205.232,23.749 J1.13 207.391,28.448 207.391,30.226 202.904,34.713 v1(202.904,41.402)
SPI1_SCK: J1.9 J2.13 J3.8 | length 55.6
  Top Layer w0.178: J3.8 187.096,47.778 188.806,47.778 v1(188.845,47.739) ; v1(201.646,41.614) 201.699,41.561 201.699,41.3 201.854,41.145 J2.13
  Bottom Layer w0.152: v1(188.845,47.739) 188.883,47.739 189.103,47.519 189.103,28.398 193.117,24.384 200.787,24.384 J1.9 203.454,27.178 202.311,28.321 202.311,31.369 201.618,32.062 201.618,41.586 v1(201.646,41.614)
SWIRE: IC1.6 J1.5 J2.9 | length 51
  Top Layer w0.178: J1.5 198.501,27.305 199.644,28.448 218.821,28.448 219.964,29.591 219.964,39.751 219.556,40.159 IC1.6 ; v1(200.512,41.402) 200.533,41.402 201.154,40.781 J2.9
  Bottom Layer w0.152: J1.5 199.61,28.287 199.61,32.986 200.533,33.909 200.533,41.381 v1(200.512,41.402)
TE: 
TP_INT: J1.2 J2.2 J3.18 J5.4 J6.32 | length 55.4
  Top Layer w0.178: J3.18 188.887,49.803 188.975,49.892 189.519,49.892 v1(189.542,49.915) ; J1.2 193.802,29.718 199.754,35.67 J2.2
  Bottom Layer w0.152: J6.32 187.543,85.127 187.543,84.11 188.235,83.418 188.235,67.434 J5.4@188.218,67.417 ; v1(189.542,49.915) 190.42,49.037 190.42,30.189 190.891,29.718 J1.2
TP_RES: J1.8 J2.8 J3.21 | length 57.7
  Top Layer w0.178: v1(182.711,51.065) 182.764,51.011 183.488,51.011 183.885,50.614 184.267,50.614 J3.21@184.289,50.592 ; J2.8 200.805,38.055 200.805,29.954 J1.8
  Bottom Layer w0.152: v1@182.711,51.065 182.711,48.645 183.097,48.26 188.618,48.26 188.626,48.268 189.064,48.268 189.072,48.26 189.13,48.26 189.487,47.903 189.487,28.445 193.04,24.892 200.533,24.892 202.221,26.58 202.221,27.693 201.246,28.668 201.246,29.513 J1.8
TP_RST: J5.1 J6.29 | length 21.4
  Bottom Layer w0.152: J5.1@189.718,67.417 189.718,76.307 190.873,77.462 190.873,86.368 190.099,87.142 190.099,87.651 J6.29
TP_SCL: J1.6 J2.6 J3.20 J5.2 J6.30 | length 61.5
  Top Layer w0.178: J3.20 188.636,50.203 189.145,50.712 v1(189.757,50.712) ; v1(190.949,32.393) 190.937,32.381 190.937,28.844 191.46,28.322 197.105,28.322 J1.6 198.501,32.639 200.454,34.592 J2.6
  Bottom Layer w0.152: J5.2@189.218,67.417 189.218,76.442 190.373,77.597 190.373,84.837 J6.30 ; v1(189.757,50.712) 189.757,50.591 190.054,50.295 190.054,50.154 190.937,49.27 190.937,32.404 v1(190.949,32.393)
TP_SDA: J1.4 J2.4 J3.19 J5.3 J6.31 | length 65.4
  Top Layer w0.178: v1(183.301,50.102) 183.415,50.102 183.516,50.203 J3.19 ; v1(191.84,28.907) 192.724,28.907 192.979,28.652 194.895,28.652 J1.4 195.961,30.988 200.104,35.131 J2.4
  Bottom Layer w0.152: v1(183.301,50.102) 183.366,50.102 183.556,50.292 188.087,50.292 190.096,48.283 190.096,29.487 190.75,28.833 191.766,28.833 v1(191.84,28.907) ; J6.31 188.718,86.492 J5.3@188.718,67.417
VCC: J4.1 J5.5 J6.1 J6.34 J8.31 pad.1@182.745,89.531 pad.1@192.03,83.711 | length 108.7
  Top Layer w0.178: pad.1@182.745,89.531 182.745,89.331 183.642,88.433 183.642,86.488 J6.34 184.732,84.254 185.275,83.711 pad.1@192.03,83.711 ; v1(187.648,72.034) 187.686,71.995 213.137,71.995 v1(213.175,71.957)
  Top Layer w0.25: J8.31 202.311,58.791 202.936,58.166 v1@210.439,58.166
  Bottom Layer w0.152: J6.34 187.718,82.412 187.718,72.104 v1(187.648,72.034) 187.691,71.99 187.691,67.444 J5.5@187.718,67.417 ; v1(210.434,58.141) 210.434,69.216 224.266,83.048 224.266,86.471 225.372,87.577 J6.1 ; J4.1 v1@210.501,58.141
VSYNC: J4.25 J6.25 | length 35.7
  Bottom Layer w0.152: J6.25 196.223,86.608 196.223,76.7 198.501,74.422 J4.25
WR: J6.36 J8.37 | length 41.1
  Top Layer w0.16: J6.36 182.192,66.14 186.964,61.368 200.841,61.368 201.076,61.133 201.076,60.272 J8.37
pads on no net: J2.23 J4.MP1 J4.MP2 J5.MP1 J5.MP2

## Polygon pours and split planes (outlines as drawn)
GND on Bottom Layer "GND_L04_P000" (solid, remove dead copper, pour order 0): 176.49,91.44 176.49,20.32 228.727,20.32 228.727,91.44

## Other copper
Bottom Layer:
  pour cut-out: 196.167,54.155 196.221,54.101 210.409,54.101 210.409,69.086 224.143,82.821 218.358,88.606 189.068,88.606 189.068,80.431 196.548,72.951 196.167,72.57

## Silkscreen, mask and mechanical layers (free items; w line width, h text height)
Top Overlay:
  circle w0.254: c203.566,65.016 r17.5
  lines w0.1: 184.268,45.259 184.268,45.163 184.277,45.163 ; 184.268,52.322 184.268,52.443 184.277,52.443
  lines w0.2: 200.021,37.463 200.021,47.534 ; 200.024,55.72 199.234,55.72 199.234,60.02 200.024,60.02 ; 207.006,40.511 197.314,40.511 197.314,37.463 207.006,37.463 207.006,47.623
  lines w0.254: 176.617,20.32 228.727,20.32 228.727,91.44 176.617,91.44 176.617,20.32
  text "3.2寸IPS" at 198.951,62.77 h1.52
  text "1      40" at 210.677,60.55 h1.52 r270
  text "20     21" at 197.279,60.257 h1.52 r270
  text "1.22TFT" at 183.283,54.454 h1.52
  text "23  24" at 183.197,52.969 h1.52
  text "1.28OLED" at 197.397,43.995 h1.52
  text "1    2" at 183.197,42.865 h1.52
  text "ELVSS" at 207.201,42.799 h1.2
  text "GND" at 207.201,41.402 h1.2
  text "3.3V" at 207.518,37.084 h1.2
  text "30   1" at 197.165,36.767 h1.52 r90
  text "ELVDD" at 207.484,35.814 h1.2
  text "TP_INT" at 194.183,31.623 h1.52 r90
  text "TP_SDA" at 196.723,31.623 h1.52 r90
  text "TP_SCL" at 199.263,31.623 h1.52 r90
  text "TP_RES" at 201.803,31.623 h1.52 r90
  text "RST" at 204.343,31.623 h1.52 r90
  text "CLK_N" at 206.883,31.623 h1.2 r90
  text "DON_P" at 214.503,31.623 h1.52 r90
  text "CLK_P" at 209.169,31.369 h1.52 r90
  text "DON_N" at 211.709,31.369 h1.52 r90
  text "GND" at 192.532,25.527 h1.52 r270
  text "3.3V" at 195.072,25.527 h1.52 r270
  text "SWIRE" at 197.612,25.527 h1.52 r270
  text "CSX" at 200.152,25.527 h1.52 r270
  text "SCKS" at 202.692,25.527 h1.52 r270
  text "DCX" at 205.232,25.527 h1.52 r270
  text "MOSI" at 207.772,25.527 h1.52 r270
  text "MISO" at 210.312,25.527 h1.52 r270
  text "DSI_TE" at 212.852,25.527 h1.52 r270
  text "Sman" at 179.218,20.75 h2 r90
Bottom Overlay:
  lines w0.203: 178.656,75.311 226.822,75.311 226.822,83.947 178.656,83.947 178.656,75.311
  text "RS" at 179.492,82.141 h1.02 r270
  text "D1" at 217.384,82.107 h1.52 r270
  text "D9" at 207.185,81.917 h1.52 r270
  text "D7" at 209.741,81.918 h1.52 r270
  text "D5" at 212.276,81.911 h1.52 r270
  text "D3" at 214.828,81.918 h1.52 r270
  text "D11" at 204.646,81.349 h1.52 r270
  text "D15" at 199.534,81.153 h1.52 r270
  text "D13" at 202.09,81.16 h1.52 r270
  text "CSX" at 222.492,80.768 h1.52 r270
  text "SDA" at 219.923,80.751 h1.52 r270
  text "LED_K" at 192.184,80.686 h1.02 r270
  text "VCC" at 225.061,80.675 h1.52 r270
  text "IOVCC" at 181.934,80.629 h1.02 r270
  text "VSYNC" at 194.729,80.406 h1.02 r270
  text "BL_CTR" at 184.516,80.092 h1.02 r270
  text "TP_RST" at 189.628,80.052 h1.02 r270
  text "TP_SDA" at 187.072,79.982 h1.02 r270
  text "DOTCLK" at 197.115,79.883 h1.02 r270
  text "RD" at 179.481,75.819 h1.02 r270
  text "WR" at 182.118,75.819 h1.02 r270
  text "VCC" at 184.537,75.82 h1.02 r270
  text "TP_INT" at 186.955,75.819 h1.02 r270
  text "TP_SCL" at 189.532,75.819 h1.02 r270
  text "LED_A" at 192.12,75.819 h1.02 r270
  text "RST" at 194.697,75.819 h1.02 r270
  text "HSYNC" at 197.115,75.819 h1.02 r270
  text "DE/TE" at 199.661,75.819 h1.52 r270
  text "D14" at 202.16,75.819 h1.52 r270
  text "D12" at 204.68,75.819 h1.52 r270
  text "D10" at 207.2,75.819 h1.52 r270
  text "D8" at 209.737,75.819 h1.52 r270
  text "D6" at 212.274,75.819 h1.52 r270
  text "D4" at 214.811,75.819 h1.52 r270
  text "D2" at 217.327,75.819 h1.52 r270
  text "D0" at 219.847,75.819 h1.52 r270
  text "SCL" at 222.384,75.819 h1.52 r270
  text "GND" at 224.934,75.819 h1.52 r270
Mechanical 1:
  the board outline again, w0.1

## Text inside footprints (layer, text, board x,y; h text height)
J1: Top Overlay "18" at 215.471,29.348 h1.02; Top Overlay "17" at 215.471,26.648 h1.02; Top Overlay "2" at 190.991,29.348 h1.02; Top Overlay "1" at 191.291,26.648 h1.02
J4: Bottom Overlay "30" at 195.451,53.787 h1.02; Bottom Overlay "1" at 211.351,53.787 h1.02
J5: Bottom Overlay "6" at 186.685,67.377 h1.02; Bottom Overlay "1" at 190.585,67.377 h1.02
J6: Bottom Overlay "37" at 176.846,88.469 h1.02 r180; Bottom Overlay "38" at 176.846,85.869 h1.02 r180; Bottom Overlay "1" at 226.702,88.468 h1.02 r180; Bottom Overlay "2" at 226.702,85.868 h1.02 r180